# Altium PCB PCB.PcbDoc
Units mm, origin at the board's own origin, x right, y up, seen from the top; angles counter-clockwise.
Board outline 59 x 54 mm, 2 copper layers (Top Layer, Bottom Layer); 76 components, 51 nets, 199 pads, 20 vias.
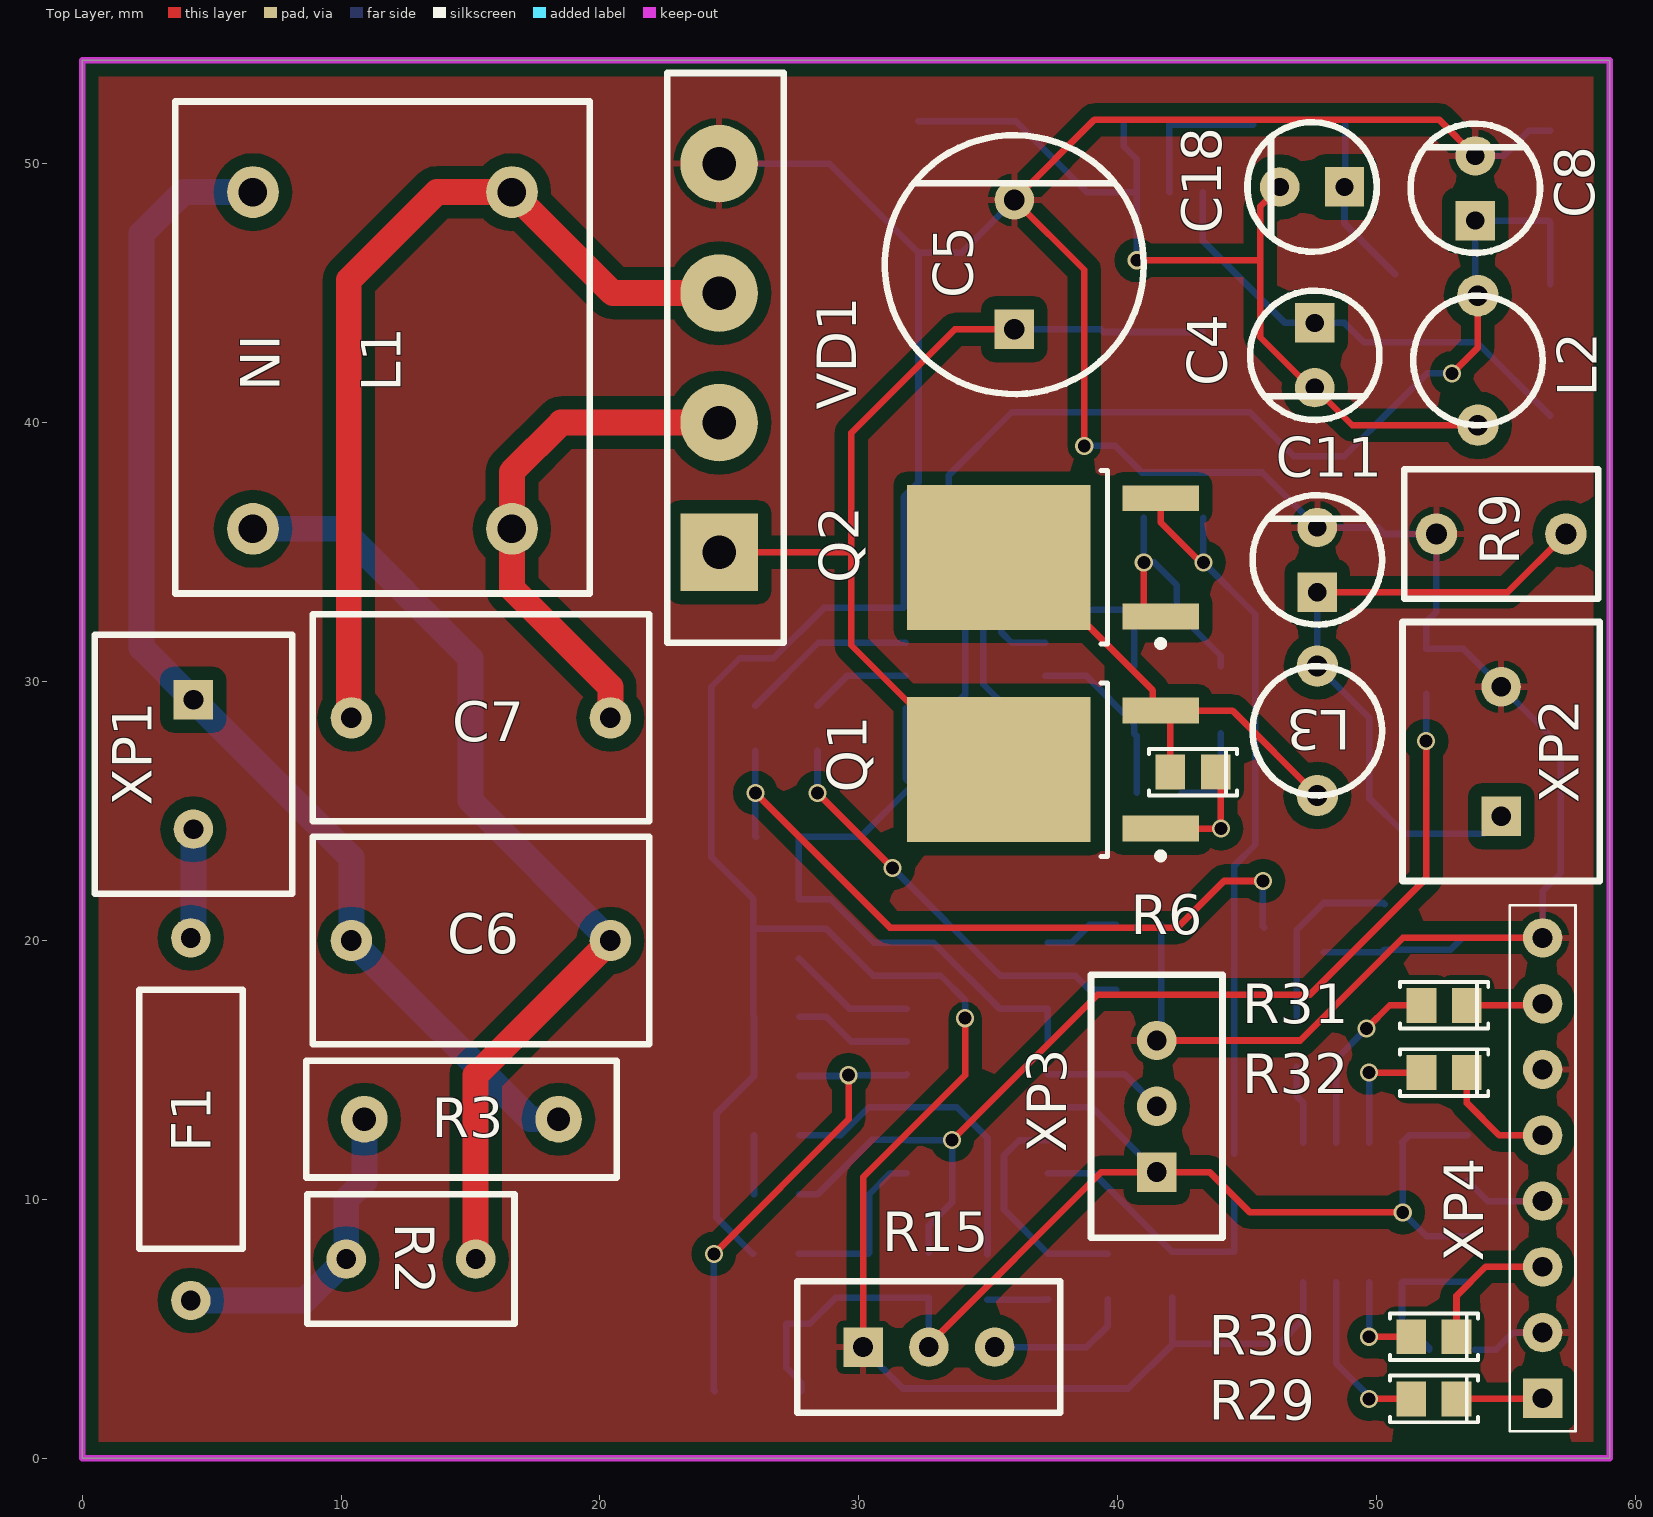
[diagram p0: Top Layer view]
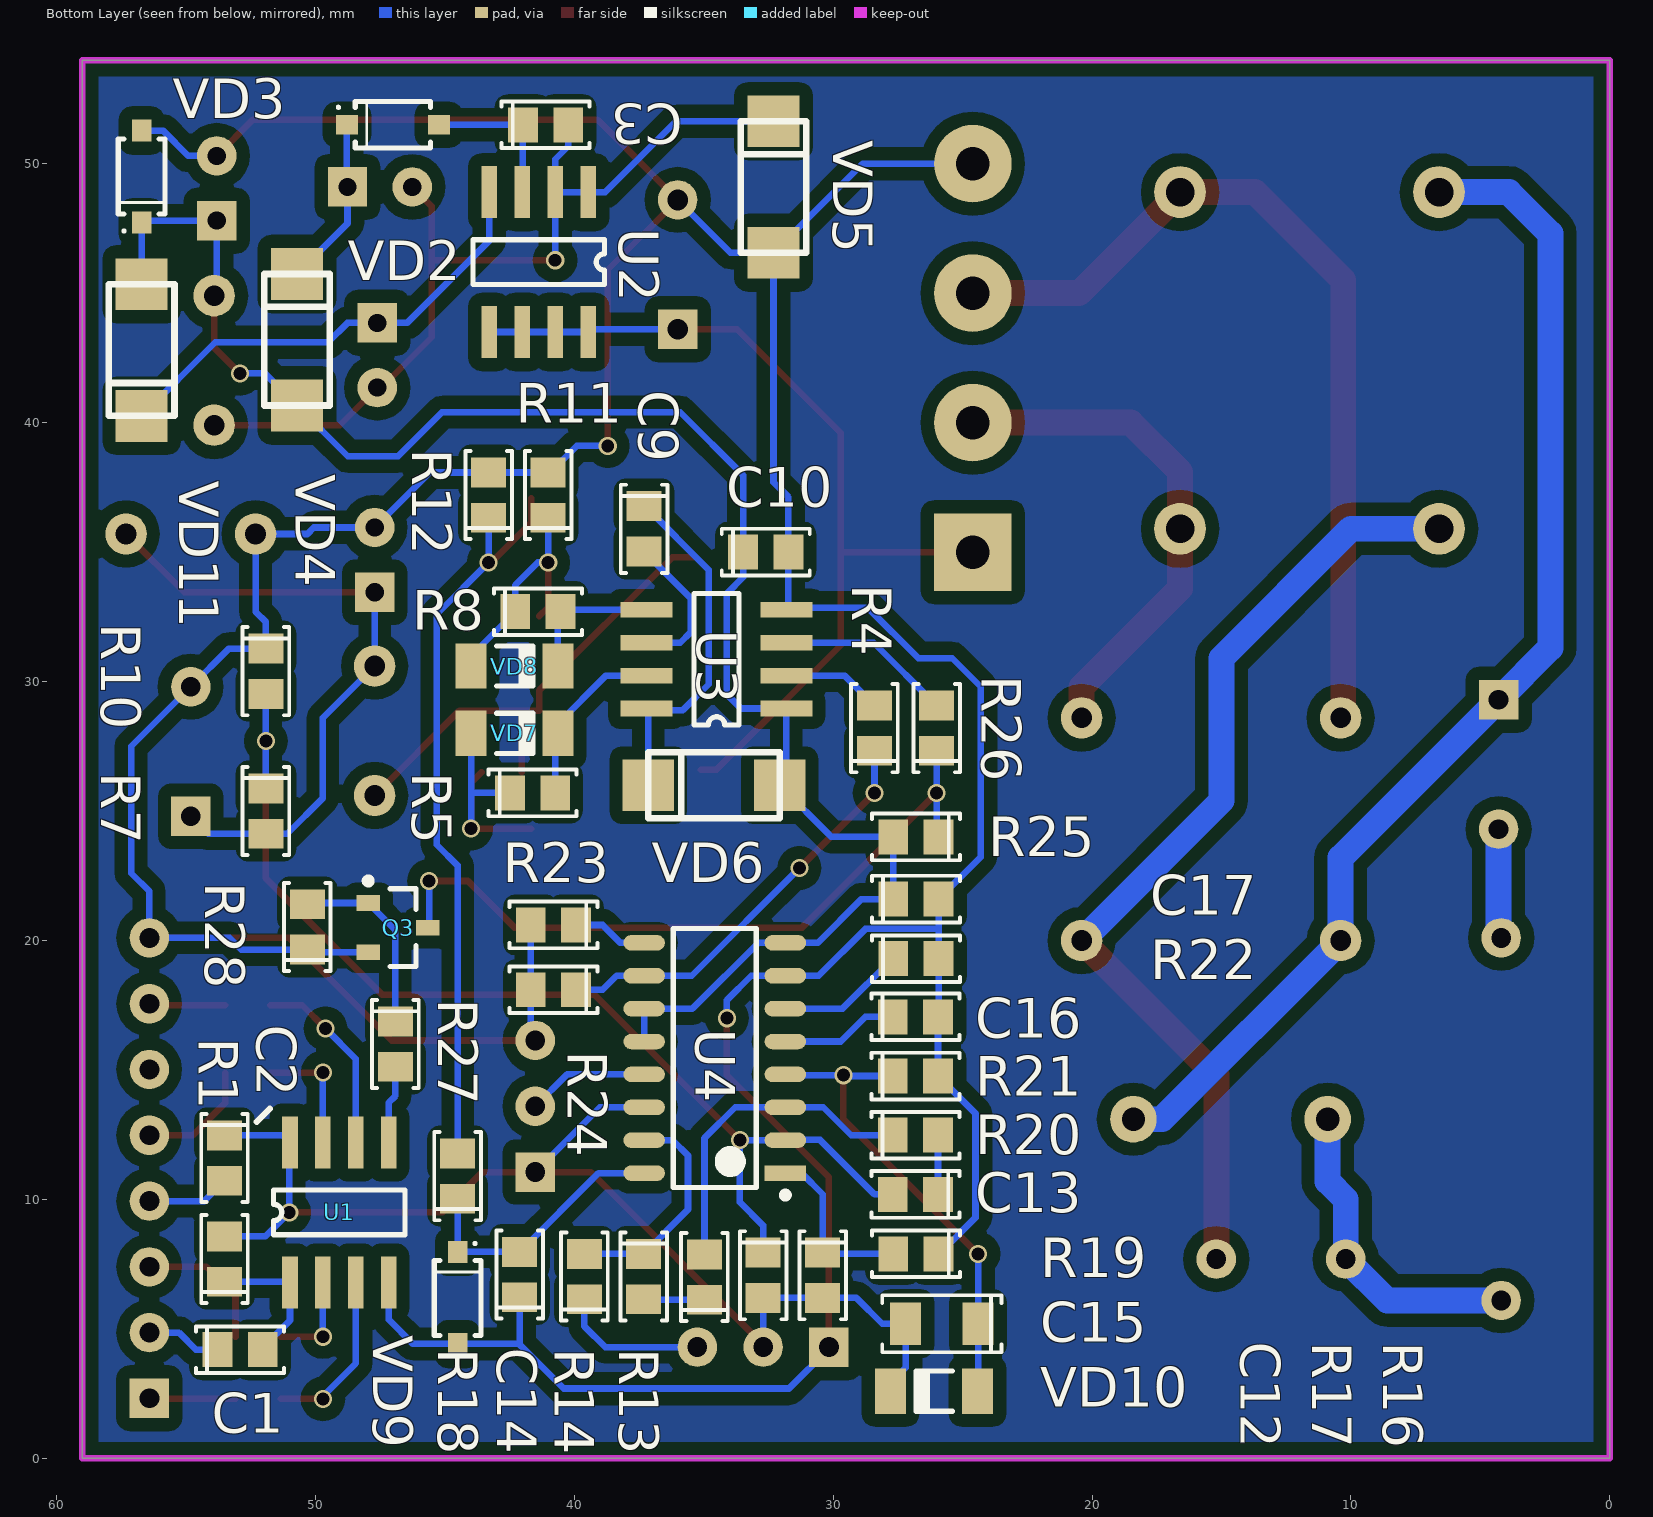
[diagram p1: Bottom Layer view, seen from below]

## Layer stack, top to bottom
Top Solder: solder mask 0.0102, Solder Resist, Dk 3.5
Top Layer: signal copper 0.0356
Dielectric 1: dielectric 0.32, FR-4, Dk 4.8
Bottom Layer: signal copper 0.0356
Bottom Solder: solder mask 0.0102, Solder Resist, Dk 3.5

## Board outline
0,0 59,0 59,54 0,54

## Design rules (kind name [scope] priority, off if disabled: settings)
Clearance [All] p1: gap=0.25 ignorepadtopadclearanceinfootprint=FALSE except(0: Arc-Hole Track-Hole SMDPad-Hole THPad-Hole Via-Hole Fill-Hole Poly-Hole Region-Hole Text-Hole; 0.5: Arc-Fill Arc-Poly Arc-Region Track-Fill Track-Poly Track-Region SMDPad-Fill SMDPad-Poly SMDPad-Region THPad-Fill THPad-Poly THPad-Region Via-Fill Via-Poly Via-Region)
PolygonConnect [All] p1: connectstyle=Relief reliefconductorwidth=0.254 reliefentries=4 polygonreliefangle="90 Angle" airgapwidth=0.254
RoutingVias [All] p1: holewidth=0.5 width=0.5 viastyle="Through Hole" minholewidth=0.5 minwidth=0.35 maxholewidth=0.7 maxwidth=1
SolderMaskExpansion [All] p1: expansion=0.102
Width [All] p1: maxlimit=2 minlimit=0.254 preferedwidth=0.254 minimp=50.000000 maximp=50.000000 favimp=50.000000
30 further rules are at their usual default settings.

## Classes and differential pairs
component class PWM: C12 C13 C14 C15 C16 C17 R13 R14 R15 R16 R17 R18 R19 R20 R21 R22 R23 R24 U4 VD9 VD10 XP3
component class Power: C3 C4 C5 C6 C7 C8 C9 C10 C11 C18 F1 L1 L2 L3 Q1 Q2 Q3 R2 R3 R4 R5 R6 R7 R8 R9 R10 R11 R12 R25 R26 R27 R28 U2 U3 VD1 VD2 VD3 VD4 VD5 VD6 VD7 VD8 VD11 XP1 XP2
component class MCU: C1 C2 R1 R29 R30 R31 R32 U1 XP4

## Components (designator, comment, footprint, x,y, rotation, side; value= is the part's Value field where it differs from the comment)
C1 "" SMD_0805 52.9,4.2 r180 bottom
C2 "" SMD_0805 53.5,11.6 r270 bottom
C3 "0.022x50V" SMD_0805 41.1,51.5 r180 bottom
C4 "0.47x25V" CAPR-5/2.5 47.6,42.6 r270 top
C5 "10x400V" CAPR-10/5 36,46.1 r90 top
C6 "" MKR-X2-0.22-10 15.4,20 r180 top
C7 "" MKR-X2-0.22-10 15.4,28.6 r180 top
C8 "47x50V" CAPR-5/2.5 53.8,49.05 r90 top
C9 "" SMD_0805 37.3,35.9 r270 bottom
C10 "" SMD_0805 32.6,35 r180 bottom
C11 "" CAPR-5/2.5 47.7,34.7 r90 top
C12 "" SMD_0805 34.965,7.004 r90 bottom
C13 "" SMD_0805 26.821,10.196 r0 bottom
C14 "" SMD_0805 42.1,7.1 r90 bottom
C15 "" SMD_1206 25.8,5.2 r0 bottom
C16 "" SMD_0805 26.821,17.054 r180 bottom
C17 "" SMD_0805 26.8,21.6 r180 bottom
C18 "4.7x25V" CAPR-5/2.5 47.5,49.1 r180 top
F1 "" KLS-1009 4.2,13.1 r90 top
L1 "PLA10AN3521R2R2B" PLA10AN3521R2R2B 6.6,48.9 r270 top
L2 "470u@0.7A" IND-DV0470.00K 53.9,39.9 r90 top
L3 "" IND-DV0470.00K 47.7,25.6 r90 top
Q1 "IRFR420" TO-252 37.5,26.6 r180 top
Q2 "IRFR420" TO-252 37.5,34.8 r180 top
Q3 "BSS138" SOT23-3PIN 46.8,20.5 r180 bottom
R1 "" SMD_0805 53.5,7.7 r90 bottom
R2 "RES NTC" NTC-5mm 10.2,7.7 r0 top
R3 "RES VARISTOR" VAR-10D 18.4,13.1 r180 top
R4 "" SMD_0805 28.4,28.2 r90 bottom
R5 "" SMD_0805 41.6,25.7 r180 bottom
R6 "" SMD_0805 42.9,26.5 r180 top
R7 "" SMD_0805 51.9,25 r270 bottom
R8 "" SMD_0805 41.4,32.7 r180 bottom
R9 "RES VARISTOR" VAR-05D 54.8,35.7 r0 top
R10 "" SMD_0805 51.9,30.4 r270 bottom
R11 "" SMD_0805 41,37.2 r90 bottom
R12 "" SMD_0805 43.3,37.2 r90 bottom
R13 "" SMD_0805 37.314,7.025 r270 bottom
R14 "" SMD_0805 39.6,7.025 r90 bottom
R15 "" HEAD-1/3/2.54 30.16,4.3 r90 top
R16 "" SMD_0805 30.4,7.075 r270 bottom
R17 "" SMD_0805 32.7,7.075 r270 bottom
R18 "" SMD_0805 44.5,10.9 r90 bottom
R19 "" SMD_0805 26.8,7.9 r0 bottom
R20 "" SMD_0805 26.821,12.482 r180 bottom
R21 "" SMD_0805 26.821,14.768 r180 bottom
R22 "" SMD_0805 26.8,19.3 r180 bottom
R23 "" SMD_0805 40.8,20.6 r0 bottom
R24 "" SMD_0805 40.8,18.1 r0 bottom
R25 "" SMD_0805 26.8,24 r0 bottom
R26 "" SMD_0805 26,28.2 r90 bottom
R27 "" SMD_0805 46.9,16 r270 bottom
R28 "" SMD_0805 50.3,20.525 r90 bottom
R29 "" SMD_0805 52.2,2.3 r180 top
R30 "" SMD_0805 52.2,4.7 r180 top
R31 "" SMD_0805 52.6,17.5 r180 top
R32 "" SMD_0805 52.6,14.9 r180 top
U1 "AtTiny13A" SO8-150mil 50.97,6.8 r90 bottom
U2 "Viper12" SO8-150mil 39.46,48.9 r270 bottom
U3 "IR2104" SO8-150mil 31.8,28.96 r0 bottom
U4 "TL494" SOIC-16 34.568,15.465 r0 bottom
VD1 "DIODE BRIDGE" "GBU BRIDGE" 24.6,35 r270 top
VD2 "" SOD-123 47,51.5 r180 bottom
VD3 "" SOD-123 56.7,49.5 r90 bottom
VD4 "" DO214-AC 50.7,43.2 r270 bottom
VD5 "" DO214-AC 32.3,49.1 r270 bottom
VD6 "" DO214-AC 34.6,26 r180 bottom
VD7 "" DIO-MELF_SOD-80 42.3,28 r0 bottom
VD8 "" DIO-MELF_SOD-80 42.3,30.6 r0 bottom
VD9 "" SOD-123 44.5,6.2 r270 bottom
VD10 "" DIO-MELF_SOD-80 26.1,2.6 r180 bottom
VD11 "" DO214-AC 56.7,42.8 r90 bottom
XP1 "CON2_0" SCREW_TERM-5.0/2 4.3,29.3 r180 top
XP2 "CON2_0" SCREW_TERM-5.0/2 54.8,24.8 r0 top
XP3 "CON_3" HEAD-1/3/2.54 41.5,11.06 r180 top
XP4 "CON_8" HEAD-1/8/2.54 56.4,2.32 r180 top

## Footprints (in the part's own frame and the unit in brackets; to place one, negate y for a bottom-side part, rotate by r counter-clockwise, add the part's x,y. Pads: shape width x height; smd on the part's side, far side on the other; paste and mask are expansions set on the pad)
CAPR-5/2.5 [mm]
  rect 1.524x1.524 hole 0.7: 1(-1.25,0)
  round 1.524 hole 0.7: 2(1.25,0)
  silkscreen extent -2.5,-2.5 2.5,2.5
CAPR-10/5 [mm]
  rect 1.524x1.524 hole 0.8: 1(-2.5,0)
  round 1.524 hole 0.8: 2(2.5,0)
  silkscreen extent -5,-5 5,5
DIO-MELF_SOD-80 [mm]
  rect 1.2x1.75 smd: 1(-1.675,0) 2(1.675,0)
  silkscreen extent -0.7,-0.78 0.7,0.77, body extent -1.85,-0.8 1.85,0.8, height 1.59
DO214-AC [mm]
  rect 2x2 smd: 1(-2.54,0) 2(2.54,0)
  silkscreen extent -2.54,-1.27 2.54,1.27
"GBU BRIDGE" [mm]
  rect 3x3 hole 1.3: 1(0,0)
  round 3 hole 1.3: 2(-5,0) 3(-10,0) 4(-15,0)
  silkscreen extent -18.5,-2 3.5,2.5
HEAD-1/3/2.54 [mil]
  rect 60x60 hole 30: 1(0,0)
  round 60 hole 30: 2(0,-100) 3(0,-200)
  silkscreen extent -100,-300 100,100
HEAD-1/8/2.54 [mil]
  rect 60x60 hole 30: 1(0,0)
  round 60 hole 30: 2(0,-100) 3(0,-200) 4(0,-300) 5(0,-400) 6(0,-500) 7(0,-600) 8(0,-700)
  silkscreen extent -50,-750 50,50
IND-DV0470.00K [mm] "https://www.rcscomponents.kiev.ua/datasheets/dvk10000k-datasheet.pdf"
  round 1.6 hole 0.8: 1(0,0) 2(5,0)
  silkscreen extent 0,-2.5 5,2.5
KLS-1009 [mil]
  round 60 hole 30: 1(-275.59,0) 2(275.59,0)
  silkscreen extent -197,-79 197,79
MKR-X2-0.22-10 [mm] "CaseC4"
  round 1.6 hole 0.8: 1(-5,0) 2(5,0)
  silkscreen extent -6.5,-4 6.5,4
NTC-5mm [mil] "http://www.kosmodrom.com.ua/pdf/B57153S.pdf"
  round 60 hole 30: 1(0,0) 2(196.85,0)
  silkscreen extent -59,-98 256,98
PLA10AN3521R2R2B [mm]
  round 2 hole 1.1: 1(0,0) 2(0,10) 3(13,10) 4(13,0)
  silkscreen extent -3.5,-3 15.5,13
SCREW_TERM-5.0/2 [mil]
  rect 60x60 hole 30: 1(0,0)
  round 60 hole 30: 2(0,196.85)
  silkscreen extent -150,-98 150,295
SMD_0805 [mm] "Chip smd, 2-Leads, Body 2.00x1.25mm, IPC Medium Density"
  rect 1.15x1.35 smd: 1(-0.875,0) 2(0.875,0)
  silkscreen extent -1.7,-0.9 1.7,0.9
SMD_1206 [mm] "Chip smd, 2-Leads, Body 3.13x1.55mm, IPC Medium Density"
  rect 1.2x1.65 smd: 1(-1.4,0) 2(1.4,0)
  silkscreen extent -2.3,-1.1 2.3,1.1
SO8-150mil [mm]
  rect 2x0.6 smd: 1(0,0) 2(0,-1.27) 3(0,-2.54) 4(0,-3.81) 5(5.4,-3.81) 6(5.4,-2.54) 7(5.4,-1.27) 8(5.4,0)
  silkscreen extent 1.84,-4.44 3.56,0.63
SOD-123 [mm]
  rect 0.85x0.75 smd: 1(-1.775,0) 2(1.775,0)
  silkscreen extent -2.15,-0.9 1.45,0.9, body extent -1.43,-0.9 1.43,0.9, height 1.35
SOIC-16 [mm]
  rect 1.6x0.6 smd: 1(-2.725,4.445)
  oval 1.6x0.6 smd: 2(-2.725,3.175) 3(-2.725,1.905) 4(-2.725,0.635) 5(-2.725,-0.635) 6(-2.725,-1.905) 7(-2.725,-3.175) 8(-2.725,-4.445) 9(2.725,-4.445) 10(2.725,-3.175) 11(2.725,-1.905) 12(2.725,-0.635) 13(2.725,0.635) 14(2.725,1.905) 15(2.725,3.175) 16(2.725,4.445)
  silkscreen extent -2.85,-5 1.6,5.42, body extent -2,-5 2,5, height 1.75
SOT23-3PIN [mm]
  rect 0.9x0.6 smd: 1(-1.15,0.95) 2(-1.15,-0.95) 3(1.15,0)
  silkscreen extent -1.28,-1.5 0.7,1.92, body extent -0.7,-1.5 0.7,1.5, height 1.1
TO-252 [mm]
  rect 2.95x1 smd: 1(-4.15,2.28) 3(-4.15,-2.28)
  rect 7.1x5.6 smd: 2(2.1,0)
  silkscreen extent -4.28,-3.35 -1.85,3.45, body extent -2.1,-3.35 4.1,3.35, height 2.4
VAR-05D [mm]
  round 1.6 hole 0.8: 1(-2.5,0) 2(2.5,0)
  silkscreen extent -3.75,-2.5 3.75,2.5
VAR-10D [mm]
  round 1.8 hole 0.9: 1(0,0) 2(7.5,0)
  silkscreen extent -2.25,-2.25 9.75,2.25

## Part data
C1 C2 C3 C6 C7 C9 C10 C12 C13 C14 C15 C16 C17: library part C_NONE_POLAR, "None polar capacitor"
C4 C5 C8 C11 C18: library part C_POLAR, "Polar capacitor"
F1: library part FUSE, "Resistor"
L1: library part "Inductor Sin"
L2 L3: library part INDUCTOR
Q1 Q2: "IG-FET N-Channel", Case=TO-252, Manufacture=Vishay, HelpURL=https://www.rcscomponents.com/datasheets/irfr420pbf.pdf, Model=IRFR420
Q3: "IG-FET N-Channel", Case=SOT-23, Manufacture=Fairchild, HelpURL=https://cdn.sparkfun.com/datasheets/BreakoutBoards/BSS138.pdf, Model=BSS138
R1 R4 R5 R6 R7 R8 R10 R11 R12 R13 R14 R16 R17 R18 R19 R20 R21 R22 R23 R24 R25 R26 R27 R28 R29 R30 R31 R32: library part RES, "Resistor"
R15: library part RES_ADJ, "Agjustable resistor"
U2: "Step-Down Converter", Manufacturer=STMicro, HelpURL=http://www.st.com/content/st_com/en/products/power-management/ac-dc-converters/high-voltage-converters/viper/viper12a-e.html, Model=Viper12-A
U4: "PWM controller"
VD2 VD3 VD9: library part ZENER, "Zener diode"
VD4 VD5 VD6 VD7 VD8 VD10 VD11: library part DIODE, "Diode"

## Via types
v1: diameter 0.7, hole 0.5, Top Layer to Bottom Layer, 20 vias

## Nets (pads, with @x,y where several pads share a name; then routed paths per layer and width w, separated by ;. In a path a pad name is that pad's centre, name@x,y a point inside that pad or via, vN(x,y) a via of type N, cw(c..) or ccw(c..) an arc to the next point about the centre after c; other vN are vias at no path point)
+5V: C2.1 C15.2 R1.2 R15.2 R16.2 R17.2 U1.8 U4.14 VD10.1 XP3.1 | length 45.9
  Top Layer w0.254: R15.2 32.7,4.4 39.36,11.06 XP3.1 43.54,11.06 45.1,9.5 v1(51,9.5)
  Bottom Layer w0.254: VD10.1 27.775,2.925 27.2,3.5 C15.2 28.1,5.2 29.1,6.2 R16.2 R17.2 R15.2 ; U4.14 39,13.56 XP3.1 ; R1.2 51.925,8.575 v1(51,9.5) 51,12.17 U1.8 51.245,12.475 C2.1
+12V: C8.1 C10.1 C17.1 L2.2 R25.2 U3.1 U4.8 U4.11 U4.12 VD3.1 VD4.2 VD6.2 VD11.2 | length 68.7
  Top Layer w0.254: v1(52.9,41.9) 53.9,42.9 L2.2
  Bottom Layer w0.254: U4.12 U4.11 35.43,17.37 32.89,19.91 U4.8 30.59,19.91 28.9,21.6 C17.1 R25.2 30.06,24 VD6.2 31.8,26.26 U3.1 33.56,28.96 34.1,29.5 34.1,33.4 33.475,34.025 C10.1 33.475,37.975 35.9,40.4 45.1,40.4 46.8,38.7 48.74,38.7 VD4.2 51.94,41.9 v1(52.9,41.9) ; L2.2 53.8,45 C8.1 56.625,47.8 VD3.1 VD11.2
GND: C1.1 C2.2 C5.2 C8.2 C10.2 C11.2 C14.1 C16.2 C17.2 Q3.2 R9.1 R10.1 R11.2 R12.2 R15.1 R19.1 R21.2 R22.2 R23.2 R24.2 R28.1 U1.4 U3.4 U4.7 VD1.4 VD3.2 VD5.2 VD9.2 XP2.2 XP3.3 XP4.2 XP4.4 XP4.6 XP4.8 | length 210
  Top Layer w0.254: R15.1 30.16,10.86 34.1,14.8 v1(34.1,17) ; v1(38.7,39.1) 38.7,45.9 C5.2 39.1,51.7 52.4,51.7 C8.2 ; XP3.3 47.04,16.14 51,20.1 XP4.8
  Bottom Layer w0.254: VD1.4 28.86,50 VD5.2 ; R19.1 25.9,7.9 24.5,9.3 24.5,13.322 R21.2 C16.2 25.925,17.075 R22.2 25.925,20.45 ; R15.1 30.16,4.24 31.7,2.7 40.4,2.7 42.125,4.425 ; v1(34.1,17) 34.1,17.7 33.16,18.64 U4.7 30.56,18.64 28.75,20.45 25.925,20.45 ; C5.2 33.96,46.56 VD5.2 ; v1(38.7,39.1) 39.9,39.1 40.925,38.075 R11.2 R12.2 45.575,38.075 C11.2 50.05,35.95 50.3,35.7 R9.1 52.3,32.7 51.9,32.3 R10.1 53.325,31.275 XP2.2 57.1,27.5 57.1,22.6 56.4,21.9 XP4.8 53.3,20.1 52.85,19.65 R28.1 50.2,19.55 Q3.2 ; XP3.3 41.675,16.315 R24.2 R23.2 ; C14.1 42.1,4.45 42.125,4.425 ; U1.4 47.16,5.36 46.225,4.425 VD9.2 42.125,4.425 ; C2.2 54.285,9.94 XP4.4 ; C1.1 54.6,4.2 55.26,4.86 XP4.2 ; C8.2 54.9,50.3 55.875,51.275 VD3.2 ; 25.925,20.45 C17.2 24.3,23.225 24.3,29.8 25.4,30.9 26.7,30.9 28.645,32.845 31.725,32.845 C10.2 31.725,37.125 32.3,37.7 VD5.2
L: F1.2 XP1.2 | length 4.2
  Bottom Layer w0.254: F1.2 F1.2@4.3,20.2
  Bottom Layer w1: F1.2@4.3,20.2 XP1.2
LED_FS: R30.2 U1.2 | length 3.7
  Top Layer w0.254: v1(49.7,4.7) R30.2
  Bottom Layer w0.254: v1(49.7,4.7) U1.2
LED_MSG: R29.2 U1.3 | length 6.9
  Top Layer w0.254: v1@49.6,2.3 v1(49.7,2.3) R29.2
  Bottom Layer w0.254: U1.3 48.43,3.67 v1@49.7,2.4 ; v1@49.6,2.3 v1@49.7,2.4 ; v1(49.7,2.3) v1@49.7,2.4
N: C6.2 L1.1 R3.1 XP1.1 | length 46.5
  Bottom Layer w1: L1.1 3.9,48.9 2.3,47.3 2.3,31.3 XP1.1 10.4,23.2 C6.2 17.3,13.1 R3.1
NetC3_1: C3.1 U2.3 VD2.2 | length 5.9
  Bottom Layer w0.254: U2.3 41.975,48.925 C3.1 VD2.2
NetC3_2: C3.2 C4.2 C18.2 L2.1 U2.1 U2.2 VD5.1 | length 35.7
  Top Layer w0.254: v1(40.73,46.27) 45.5,46.27 ; C18.2 45.5,48.35 45.5,46.27 ; L2.1 49.05,39.9 C4.2 47.45,41.35 45.5,43.3 45.5,46.27
  Bottom Layer w0.254: VD5.1 36.06,51.64 38.8,48.9 U2.1 U2.2 ; C3.2 40.225,50.675 40.73,50.17 U2.2 ; v1(40.73,46.27) U2.2
NetC4_1: C4.1 U2.4 VD11.1 | length 18.1
  Bottom Layer w0.254: U2.4 43.27,47.03 46.45,43.85 C4.1 48.75,43.85 49.5,43.1 53.86,43.1 VD11.1
NetC5_1: C5.1 Q1.2 U2.5 U2.6 U2.7 U2.8 VD1.1 | length 36
  Top Layer w0.254: VD1.1 29.7,35 ; Q1.2@35.1,26.6 34.5,26.6 29.7,31.4 29.7,35 ; C5.1 33.7,43.6 29.7,39.6 29.7,35
  Bottom Layer w0.254: C5.1 39.36,43.6 U2.8 U2.7 U2.6 U2.5
NetC6_1: C6.1 L1.4 R2.2 | length 38.1
  Top Layer w1: R2.2 15.2,14.8 C6.1
  Bottom Layer w1: L1.4 10,35.9 15,30.9 15,25.4 C6.1
NetC7_1: C7.1 L1.3 VD1.2 | length 19.9
  Top Layer w1: C7.1 20.4,29.8 16.6,33.6 L1.3 16.6,38.1 18.5,40 VD1.2
NetC7_2: C7.2 L1.2 VD1.3 | length 34.3
  Top Layer w1: C7.2 10.3,28.7 10.3,45.5 13.7,48.9 L1.2 20.5,45 VD1.3
NetC9_1: C9.1 U3.8 VD6.1 | length 13.6
  Bottom Layer w0.254: VD6.1 37.14,28.9 35.8,28.9 34.8,29.9 34.8,34.314 37.261,36.775 C9.1
NetC9_2: C9.2 U3.6 | length 5.7
  Bottom Layer w0.254: U3.6 35.9,31.5 35.5,31.9 35.5,33.225 C9.2
NetC11_1: C11.1 L3.2 R7.2 R9.2 XP2.1 | length 25.3
  Top Layer w0.254: C11.1 55.05,33.45 R9.2
  Bottom Layer w0.254: C11.1 L3.2 49.7,28.6 49.7,25.5 51.075,24.125 R7.2 54.125,24.125 XP2.1
NetC12_1: C12.1 R13.2 | length 2.4
  Bottom Layer w0.254: C12.1 37.293,6.129 R13.2
NetC12_2: C12.2 R20.1 U4.3 | length 12.7
  Bottom Layer w0.254: R20.1 29.299,12.482 30.377,13.56 U4.3 33.777,13.56 34.965,12.372 C12.2
NetC13_1: C13.1 R20.2 | length 2.3
  Bottom Layer w0.254: C13.1 R20.2
NetC13_2: C13.2 R7.1 R10.2 R17.1 U4.2 | length 45.2
  Top Layer w0.254: v1(33.6,12.3) 39.2,17.9 47.4,17.9 51.9,22.4 v1(51.9,27.7)
  Bottom Layer w0.254: C13.2 28.396,10.196 30.5,12.3 31.833,12.3 U4.2 v1@33.59,12.29 ; R17.1 32.7,9 33.6,9.9 v1(33.6,12.3) ; 51.9,28.125 R7.1 v1(51.9,27.7) R10.2
NetC14_2: C14.2 R18.1 U4.16 VD9.1 | length 10.5
  Bottom Layer w0.254: U4.16 39.055,11.02 C14.2 VD9.1 R18.1
NetC15_1: C15.1 R21.1 U4.4 VD10.2 | length 18.5
  Top Layer w0.254: v1(24.4,7.9) 29.6,13.1 v1(29.6,14.8)
  Bottom Layer w0.254: v1(24.4,7.9) 24.4,2.625 VD10.2 ; R21.1 29.568,14.768 v1(29.6,14.8) 31.813,14.8 U4.4
NetC16_1: C16.1 U4.5 | length 4.5
  Bottom Layer w0.254: C16.1 28.746,17.054 29.7,16.1 U4.5
NetC18_1: C18.1 VD2.1 VD4.1 | length 6.6
  Bottom Layer w0.254: VD2.1 48.775,49.125 C18.1 48.75,47.69 VD4.1
NetF1_1: F1.1 R2.1 R3.2 | length 12.4
  Bottom Layer w1: F1.1 8.6,6.1 R2.1 10.2,10 10.9,10.7 R3.2
NetL3_1: L3.1 Q1.3 Q2.2 R6.2 | length 19
  Top Layer w0.254: Q2.2 36.2,34.8 41.35,29.65 41.35,28.88 Q1.3 Q1.3@42.1,28.88 ; R6.2 42.025,28.805 Q1.3@42.1,28.88 ; L3.1 44.42,28.88 Q1.3@42.1,28.88
NetQ1_1: Q1.1 R5.1 R6.1 VD7.2 | length 10.3
  Top Layer w0.254: Q1.1 44.18,24.32 44.175,24.325 v1(43.975,24.325) 43.975,26.1 R6.1@43.575,26.5
  Bottom Layer w0.254: R5.1 43.975,25.7 ; v1(43.975,24.325) 43.975,25.7 ; VD7.2 43.975,25.7
NetQ2_1: Q2.1 R8.1 R11.1 VD8.2 | length 9.4
  Top Layer w0.254: v1(41,34.6) 41,32.87 Q2.1@41.35,32.52
  Bottom Layer w0.254: R11.1 v1(41,34.6) 41.4,34.6 42.275,33.725 R8.1 43.975,31 VD8.2
NetQ2_3: Q2.3 R12.1 R18.2 | length 28.9
  Top Layer w0.254: Q2.3 41.65,36.15 43.2,34.6 v1(43.3,34.6)
  Bottom Layer w0.254: R12.1 v1(43.3,34.6) 45.3,32.6 45.3,23.7 44.5,22.9 R18.2
NetQ3_1: Q3.1 R27.1 R28.2 | length 7.4
  Bottom Layer w0.254: R27.1 46.9,20.4 Q3.1 50.25,21.45 R28.2
NetQ3_3: Q3.3 R25.1 R26.1 | length 27.7
  Top Layer w0.254: v1(26,25.7) 31.2,20.5 42.3,20.5 44.1,22.3 v1(45.6,22.3)
  Bottom Layer w0.254: R26.1 v1(26,25.7) 26,24.025 R25.1@26.025,24 ; v1(45.6,22.3) 45.6,20.55 Q3.3
NetR4_1: R4.1 R24.1 U4.10 | length 16.3
  Top Layer w0.254: v1(28.4,25.7) v1(31.3,22.8)
  Bottom Layer w0.254: v1(28.4,25.7) R4.1 ; v1(31.3,22.8) 35.46,18.64 U4.10 38.36,18.64 38.9,18.1 R24.1
NetR4_2: R4.2 U3.2 | length 3.9
  Bottom Layer w0.254: R4.2 29.555,30.23 U3.2
NetR5_2: R5.2 U3.7 VD7.1 | length 6.9
  Bottom Layer w0.254: U3.7 38.77,30.23 40.625,28.375 VD7.1 40.725,27.9 R5.2
NetR8_2: R8.2 U3.5 VD8.1 | length 5.5
  Bottom Layer w0.254: U3.5 40.455,32.77 R8.2 40.625,32.6 VD8.1
NetR13_1: R13.1 R14.2 U4.15 | length 8.7
  Bottom Layer w0.254: U4.15 36.19,12.29 35.6,11.7 35.6,9.614 R13.1 R14.2
NetR14_1: R14.1 R15.3 | length 5.7
  Bottom Layer w0.254: R15.3 38.8,4.3 39.6,5.1 R14.1
NetR16_1: R16.1 R19.2 U4.1 | length 6.8
  Bottom Layer w0.254: R19.2 30.35,7.9 R16.1 30.4,10.2 31.22,11.02 U4.1
NetR22_1: R22.1 U4.6 | length 5
  Bottom Layer w0.254: R22.1 27.7,19.3 29.63,17.37 U4.6
NetR23_1: R23.1 U4.9 | length 2.9
  Bottom Layer w0.254: U4.9 38.21,19.91 38.9,20.6 R23.1
NetR26_2: R26.2 U3.3 | length 6.8
  Bottom Layer w0.254: R26.2 28.425,31.5 U3.3
NetR29_1: R29.1 XP4.1 | length 3.3
  Top Layer w0.254: R29.1 56.38,2.3 XP4.1
NetR30_1: R30.1 XP4.3 | length 5.4
  Top Layer w0.254: R30.1 53.075,6.275 54.2,7.4 XP4.3
NetR31_1: R31.1 XP4.7 | length 2.9
  Top Layer w0.254: R31.1 56.34,17.5 XP4.7
NetR32_1: R32.1 XP4.5 | length 4.6
  Top Layer w0.254: R32.1 53.475,13.725 54.72,12.48 XP4.5 XP4.5@56.38,12.5
NetU4_13: U4.13 XP3.2 | length 4.7
  Bottom Layer w0.254: U4.13 40.27,14.83 XP3.2
RESET: C1.2 R1.1 U1.1 | length 5.6
  Bottom Layer w0.254: C1.2 52.025,4.275 50.97,5.33 U1.1 50.995,6.825 R1.1
SDWN: R27.2 U1.5 | length 3
  Bottom Layer w0.254: R27.2 46.9,14 47.16,13.74 U1.5
SW_MODE: R31.2 U1.6 | length 7.4
  Top Layer w0.254: v1(49.6,16.6) 50.5,17.5 R31.2
  Bottom Layer w0.254: U1.6 48.43,15.43 v1(49.6,16.6)
SW_PWR: R32.2 U1.7 | length 4.7
  Top Layer w0.254: v1(49.7,14.9) R32.2
  Bottom Layer w0.254: U1.7 v1(49.7,14.9)

## Polygon pours and split planes (outlines as drawn)
no net on Bottom Layer "Bottom Layer-No Net" (solid, pour order 4): 0.5,53.5 0.5,0.5 58.5,0.5 58.5,53.5
GND on Top Layer "TOP GND" (solid, pour order 2): 0,54 0,0 59,0 59,54

## Keep-outs
Keep-Out Layer:
  the board outline again, w0.254

## Silkscreen, mask and mechanical layers (free items; w line width, h text height)
Bottom Overlay:
  lines w0.25: 51.75,13.5 52.25,13 ; 52.25,13 52.25,13

## Text inside footprints (layer, text, board x,y; h text height)
L1: Top Overlay "IN" at 6.1,43.4 h1.52 r270